# Altium PCB ui_pcb.PcbDoc
Units mm, origin at the board's own origin, x right, y up, seen from the top; angles counter-clockwise.
Board outline 60 x 75 mm, 4 copper layers (Top Layer, Int1 (GND), Int2 (PWR), Bottom Layer), stack 1.203 mm thick; 32 components, 36 nets, 112 pads, 0 vias.
Unrouted connection lines stored in the file: 72.
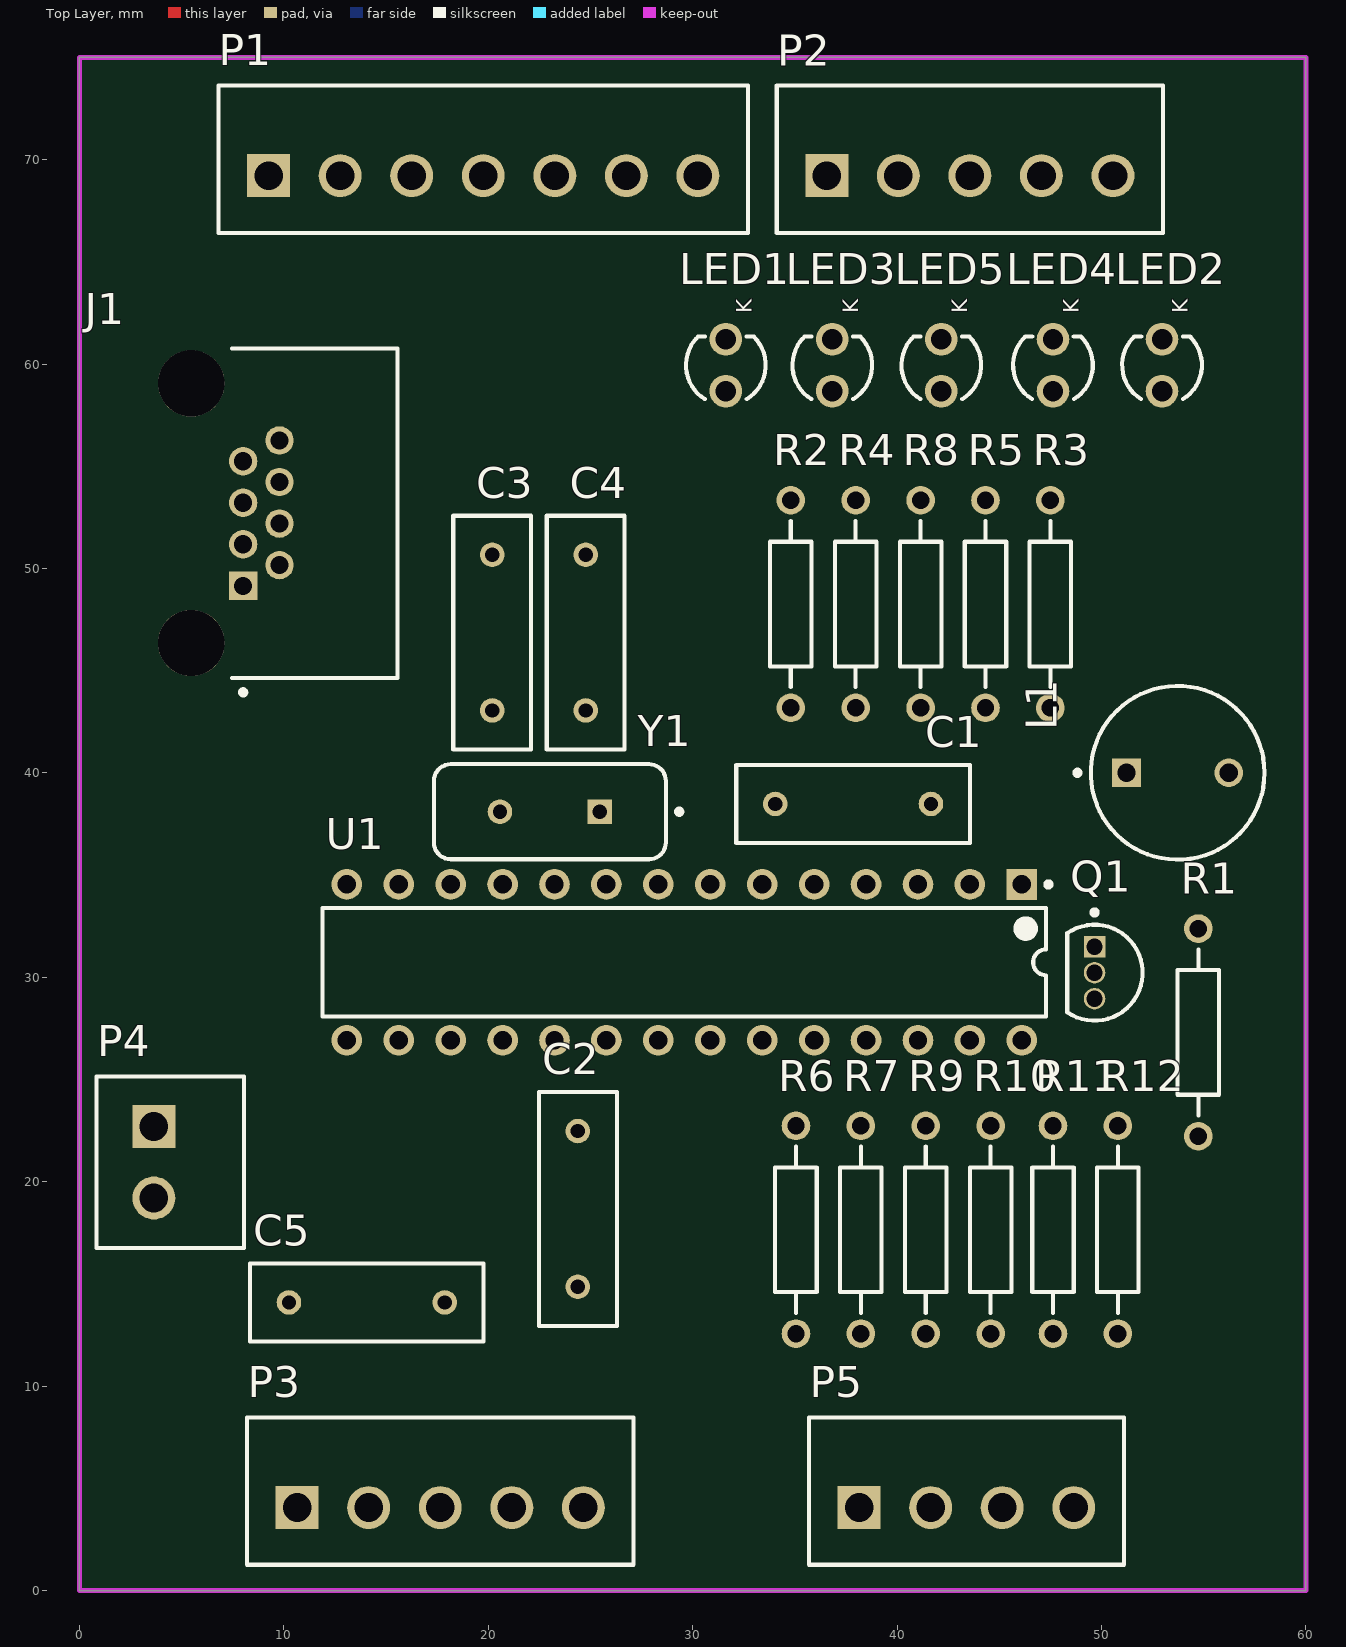
[diagram p0: Top Layer view]
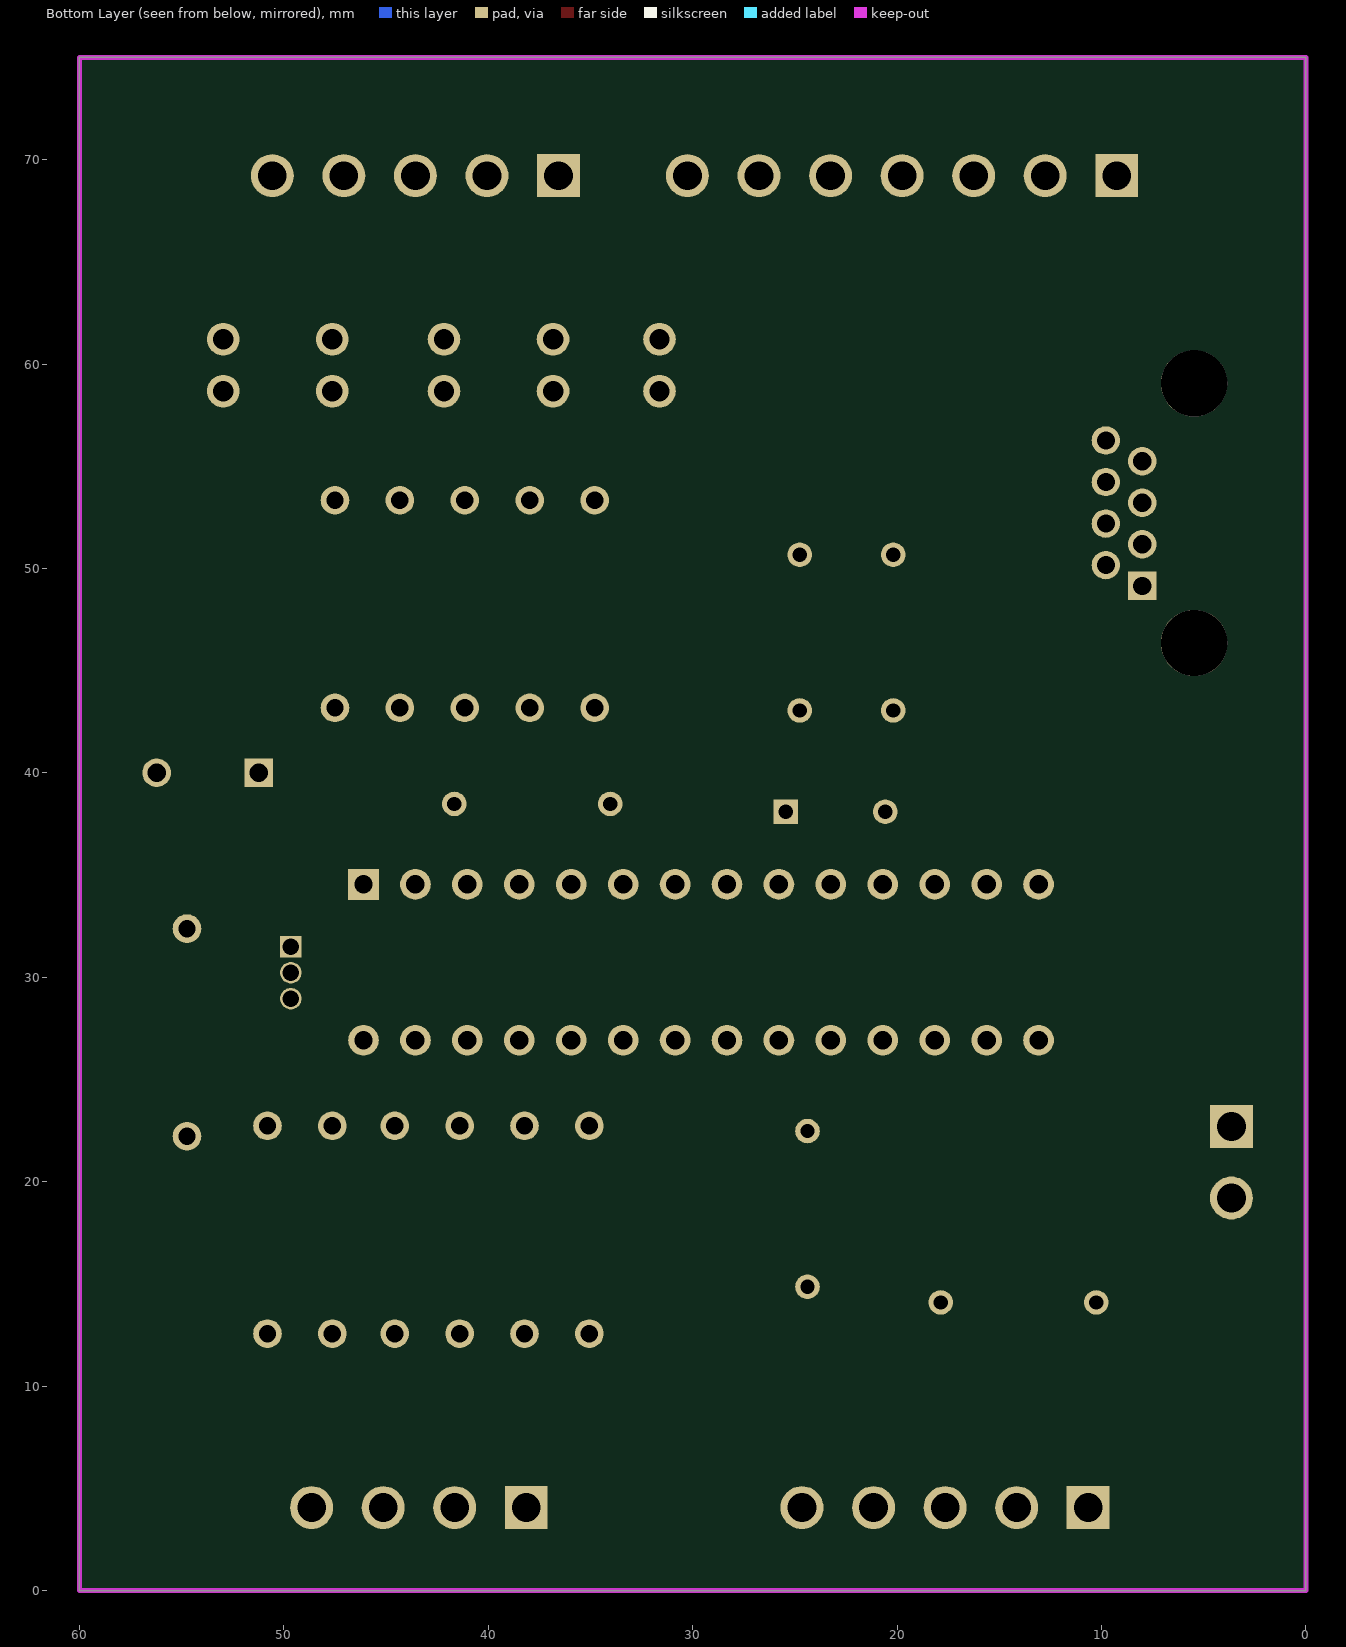
[diagram p1: Bottom Layer view, seen from below]
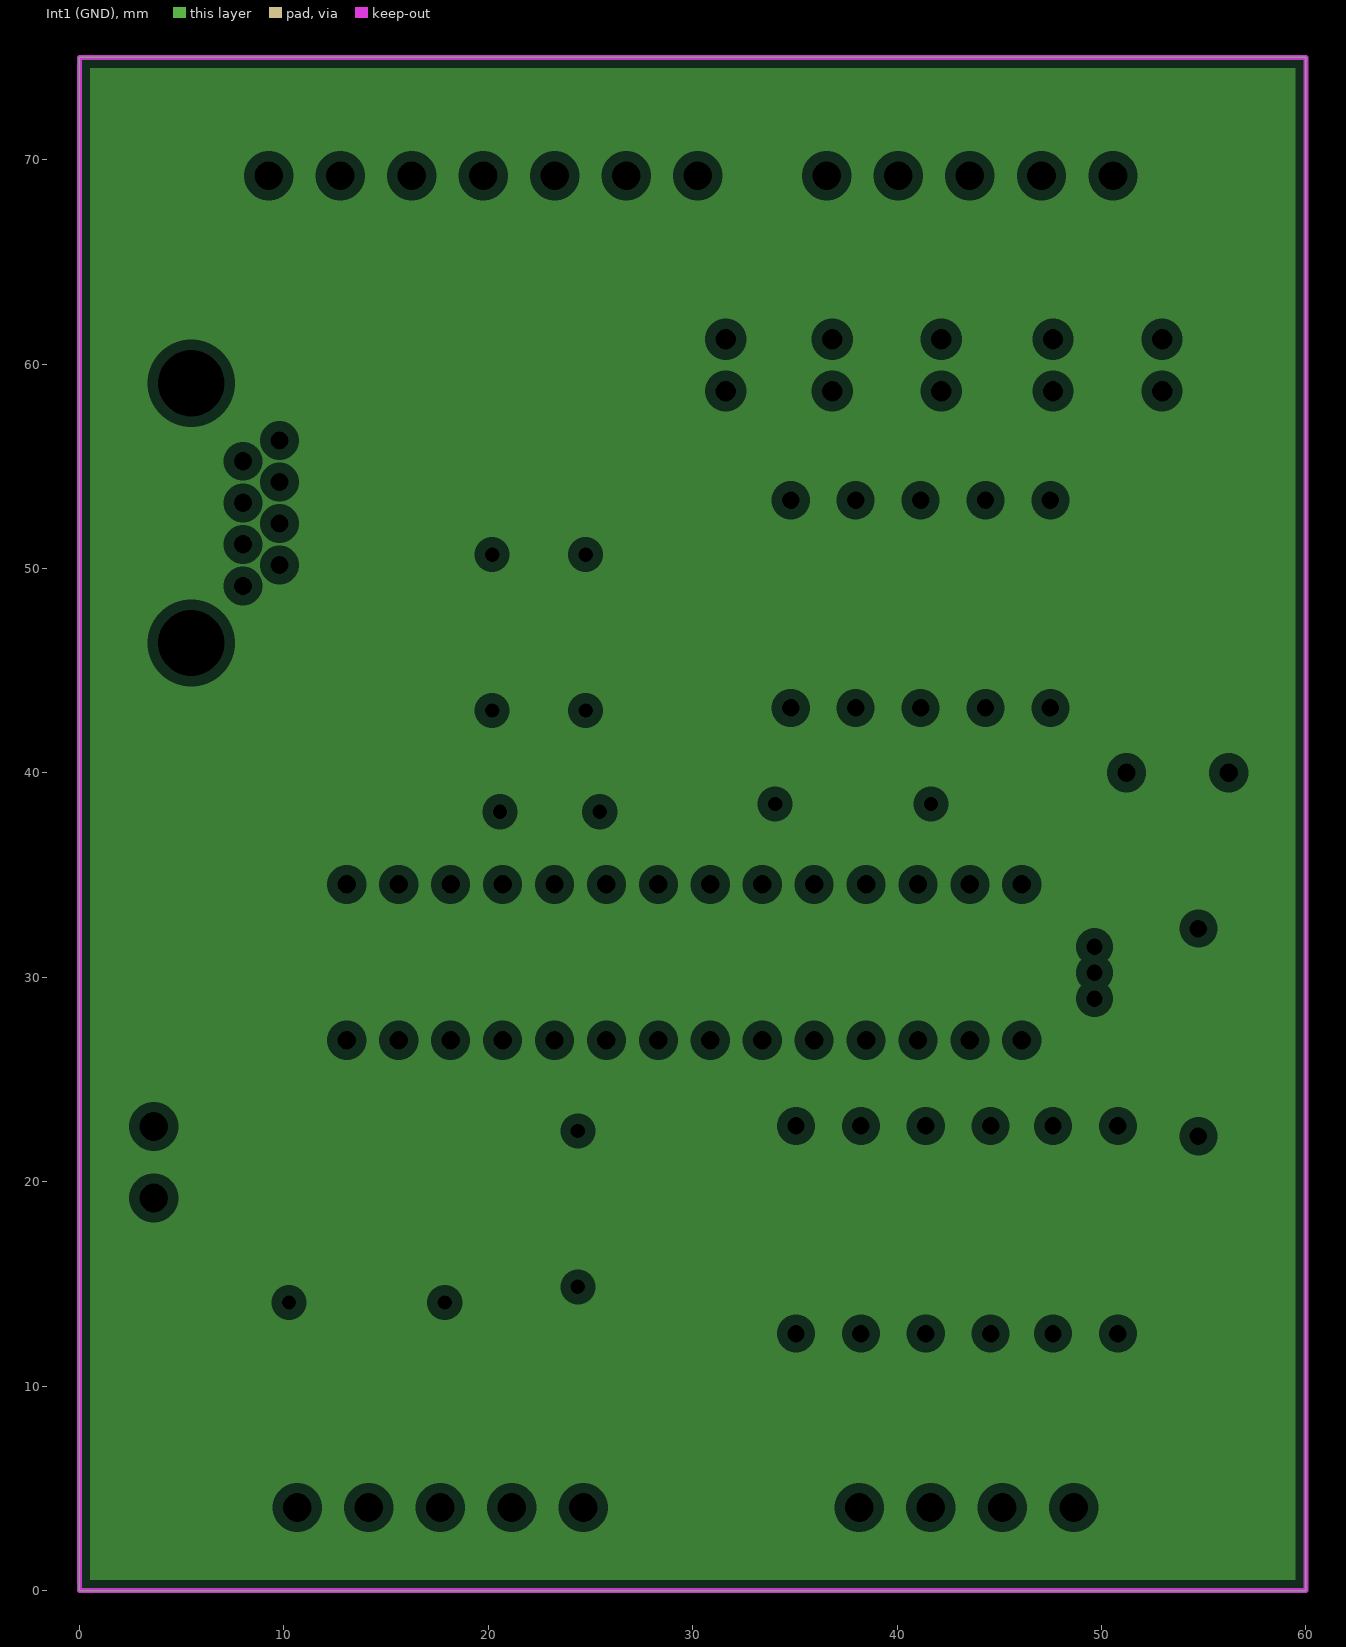
[diagram p2: Int1 (GND), clearances drawn from the general rule]
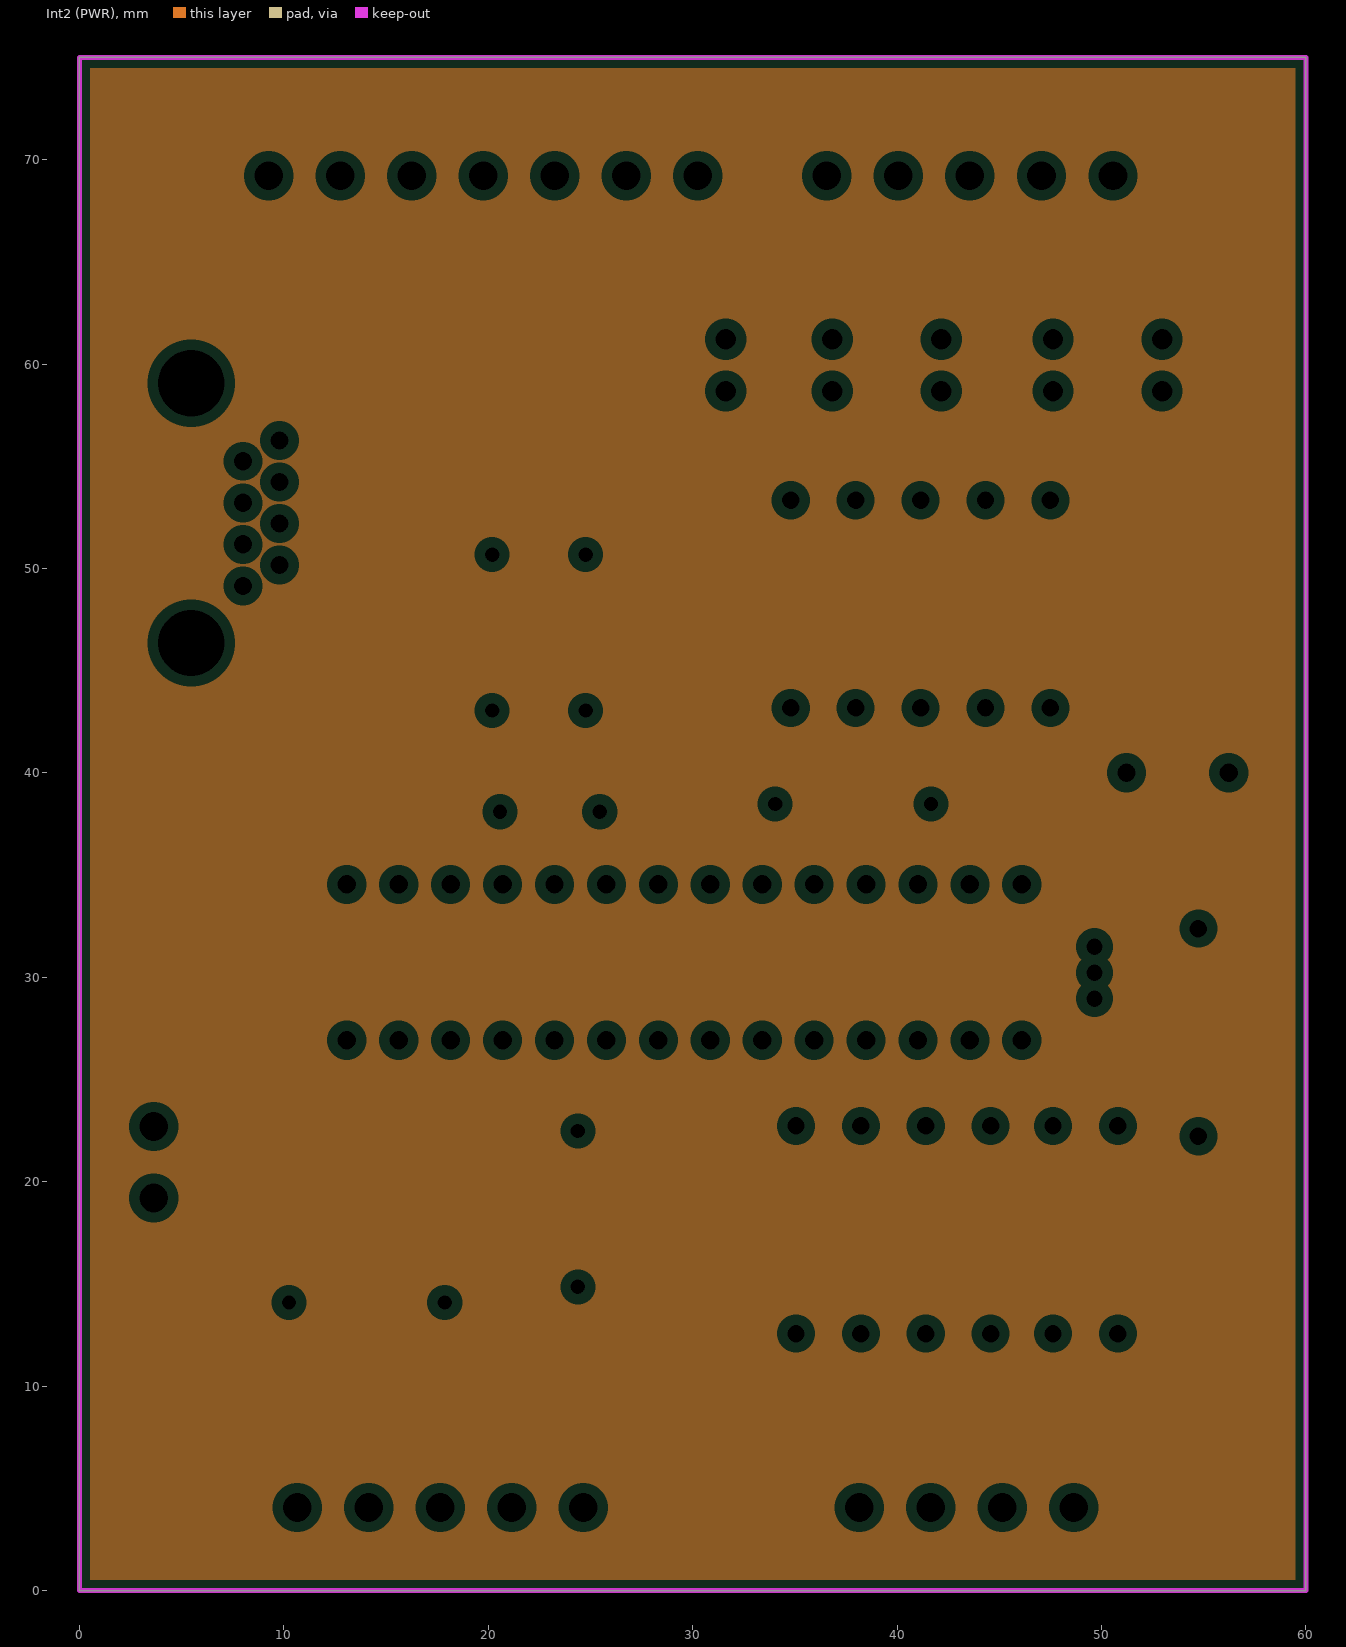
[diagram p3: Int2 (PWR), clearances drawn from the general rule]

## Layer stack, top to bottom
Top Solder: solder mask 0.0254, SM-001, Dk 4
Top Layer: signal copper 0.018
Dielectric 1: prepreg 0.0965, PP-012, Dk 4
Dielectric 2: prepreg 0.0965, PP-012, Dk 4
Int1 (GND): plane copper 0.035
Dielectric 3: core 0.7112, Core-039, Dk 4.8
Int2 (PWR): plane copper 0.035
Dielectric 4: prepreg 0.0965, PP-012, Dk 4
Dielectric 5: prepreg 0.0965, PP-012, Dk 4
Bottom Layer: signal copper 0.018
Bottom Solder: solder mask 0.0254, SM-001, Dk 4

## Board outline
0,0 60,0 60,75 0,75

## Design rules (kind name [scope] priority, off if disabled: settings)
Clearance [All] p1: gap=0.254 ignorepadtopadclearanceinfootprint=FALSE except(0: Arc-Hole Track-Hole SMDPad-Hole THPad-Hole Via-Hole Fill-Hole Poly-Hole Region-Hole Text-Hole)
PlaneClearance [All] p1: clearance=0.508
PlaneConnect [All] p1: planeconnectstyle=Relief reliefexpansion=0.508 reliefentries=4 reliefconductorwidth=0.254 reliefairgap=0.254
PolygonConnect [All] p1: connectstyle=Relief reliefconductorwidth=0.254 reliefentries=4 polygonreliefangle="90 Angle" airgapwidth=0.254
RoutingVias [All] p1: holewidth=0.711 width=1.27 viastyle="Through Hole" minholewidth=0.711 minwidth=1.27 maxholewidth=0.711 maxwidth=1.27
SolderMaskExpansion [All] p1: expansion=0.102 istentingtop=FALSE
Width [All] p1: maxlimit=0.254 minlimit=0.254 preferedwidth=0.254
28 further rules are at their usual default settings.

## Classes and differential pairs
component class U_ui_IO: C5 J1 LED1 LED2 LED3 LED4 LED5 P1 P2 P3 P4 P5 R2 R3 R4 R5 R6 R7 R8 R9 R10 R11 R12
component class U_uC_ui: C1 C2 C3 C4 L1 Q1 R1 U1 Y1

## Components (designator, comment, footprint, x,y, rotation, side; value= is the part's Value field where it differs from the comment)
C1 "Cap" RAD-0.3 37.846,38.481 r0 top value=100nF
C2 "Cap" RAD-0.3 24.384,18.669 r90 top value=100nF
C3 "Cap" RAD-0.3 20.193,46.863 r270 top value=22pF
C4 "Cap" RAD-0.3 24.765,46.863 r270 top value=22pF
C5 "Cap" RAD-0.3 14.062,14.097 r0 top value=100nF
J1 "RJHSE-5080" FP-RJHSE-5080-MFG 7.883,52.705 r270 top
L1 "10mH" INDR62-500-1100X850X1100 53.721,40.005 r0 top
LED1 "151033RS03000" "Type 3mm" 31.623,59.944 r90 top
LED2 "151033RS03000" "Type 3mm" 52.959,59.944 r90 top
LED3 "151033RS03000" "Type 3mm" 36.83,59.944 r90 top
LED4 "151033RS03000" "Type 3mm" 47.625,59.944 r90 top
LED5 "151033RS03000" "Type 3mm" 42.164,59.944 r90 top
P1 "691321100007" 691321100007 19.756,70.015 r0 top
P2 "691321100005" 691321100005 43.561,70.015 r0 top
P3 "691321100005" 691321100005 17.653,4.864 r0 top
P4 "691321100002" 691321100002 4.445,20.955 r270 top
P5 "691321100004" 691321100004 43.391,4.864 r0 top
Q1 "P2N2222AG" ONSC-TO-92-3-29-11 49.657,30.226 r270 top
R1 "Res1" AXIAL-0.4 54.737,27.305 r270 top value=10K
R2 "Res3" AXIAL-0.4 34.798,48.26 r270 top value=330
R3 "Res3" AXIAL-0.4 47.498,48.26 r270 top value=330
R4 "Res3" AXIAL-0.4 37.973,48.26 r270 top value=330
R5 "Res3" AXIAL-0.4 44.323,48.26 r270 top value=330
R6 "Res1" AXIAL-0.4 35.052,17.653 r270 top value=10k
R7 "Res1" AXIAL-0.4 38.227,17.653 r90 top value=10k
R8 "Res3" AXIAL-0.4 41.148,48.26 r270 top value=330
R9 "Res1" AXIAL-0.4 41.402,17.653 r270 top value=10k
R10 "Res1" AXIAL-0.4 44.577,17.653 r90 top value=10k
R11 "Res1" AXIAL-0.4 47.625,17.653 r270 top value=10k
R12 "Res1" AXIAL-0.4 50.8,17.653 r90 top value=10k
U1 "ATmega328-PU" 28P3 29.591,30.734 r270 top
Y1 "FOXSLF/160-20" FOX-FOXSLF160-20 23.014,38.1 r180 top

## Footprints (in the part's own frame and the unit in brackets; to place one, negate y for a bottom-side part, rotate by r counter-clockwise, add the part's x,y. Pads: shape width x height; smd on the part's side, far side on the other; paste and mask are expansions set on the pad)
28P3 [mm] "28-Pin Plastic Dual In-Line Package (PDIP)"
  rect 1.5x1.5 hole 0.9: 1(-3.81,16.51)
  round 1.5 hole 0.9: 2(-3.81,13.97) 3(-3.81,11.43) 4(-3.81,8.89) 5(-3.81,6.35) 6(-3.81,3.81) 7(-3.81,1.27) 8(-3.81,-1.27) 9(-3.81,-3.81) 10(-3.81,-6.35) 11(-3.81,-8.89) 12(-3.81,-11.43) 13(-3.81,-13.97) 14(-3.81,-16.51) 15(3.81,-16.51) 16(3.81,-13.97) 17(3.81,-11.43) 18(3.81,-8.89) 19(3.81,-6.35) 20(3.81,-3.81) 21(3.81,-1.27) 22(3.81,1.27) 23(3.81,3.81) 24(3.81,6.35) 25(3.81,8.89) 26(3.81,11.43) 27(3.81,13.97) 28(3.81,16.51)
  silkscreen extent -3.93,-17.7 2.65,17.94, body extent -3.6,-17.65 3.6,17.65, height 4.58
691321100002 [mm] "Vertical PCB Header, pitch 3.5mm, 02p"
  rect 2.1x2.1 hole 1.4: 1(-1.75,-0.8)
  round 2.1 hole 1.4: 2(1.75,-0.8)
  silkscreen extent -4.2,-3.6 4.2,3.6, body extent -4.2,-3.6 4.2,3.6, height 9.3
691321100004 [mm] "Vertical PCB Header, pitch 3.5mm, 04p"
  rect 2.1x2.1 hole 1.4: 1(-5.25,-0.8)
  round 2.1 hole 1.4: 2(-1.75,-0.8) 3(1.75,-0.8) 4(5.25,-0.8)
  silkscreen extent -7.7,-3.6 7.7,3.6, body extent -7.7,-3.6 7.7,3.6, height 9.3
691321100005 [mm] "Vertical PCB Header, pitch 3.5mm, 05p"
  rect 2.1x2.1 hole 1.4: 1(-7,-0.8)
  round 2.1 hole 1.4: 2(-3.5,-0.8) 3(0,-0.8) 4(3.5,-0.8) 5(7,-0.8)
  silkscreen extent -9.45,-3.6 9.45,3.6, body extent -9.45,-3.6 9.45,3.6, height 9.3
691321100007 [mm] "Vertical PCB Header, pitch 3.5mm, 07p"
  rect 2.1x2.1 hole 1.4: 1(-10.5,-0.8)
  round 2.1 hole 1.4: 2(-7,-0.8) 3(-3.5,-0.8) 4(0,-0.8) 5(3.5,-0.8) 6(7,-0.8) 7(10.5,-0.8)
  silkscreen extent -12.95,-3.6 12.95,3.6, body extent -12.95,-3.6 12.95,3.6, height 9.3
AXIAL-0.4 [mm] "Axial Device, Thru-Hole; 2 Leads; 0.4 in Pin Spacing"
  round 1.4 hole 0.85: 1(-5.08,0) 2(5.08,0)
  silkscreen extent -4.06,-1.02 4.06,1.02
FOX-FOXSLF160-20 [mm] "THD, 2-Leads, Body 11.35x4.65mm"
  rect 1.2x1.2 hole 0.7: 1(-2.44,0)
  round 1.2 hole 0.7: 2(2.44,0)
  silkscreen extent -6.45,-2.32 5.68,2.32, body extent -5.67,-2.32 5.68,2.33, height 3.6
FP-RJHSE-5080-MFG [mm]
  rect 1.39x1.39 hole 0.89 paste-1000 mask+0: 1(3.556,0.127)
  round 1.39 hole 0.89 paste-1000 mask+0: 2(2.54,1.905) 3(1.524,0.127) 4(0.508,1.905) 5(-0.508,0.127) 6(-1.524,1.905) 7(-2.54,0.127) 8(-3.556,1.905)
  round 3.25 hole 3.25 unplated paste-1000 mask+0: ""(-6.35,-2.413) ""(6.35,-2.413)
  silkscreen extent -8.06,-0.41 8.89,7.68, body extent -8.16,-7.78 8.16,7.78, height 0.25
INDR62-500-1100X850X1100 [mm] "THD, 2-Leads, Dia 8.5mm, Pitch 5mm"
  rect 1.4x1.4 hole 0.9 unplated: 1(-2.5,0)
  round 1.4 hole 0.9 unplated: 2(2.5,0)
  silkscreen extent -5.02,-4.25 4.25,4.25, body extent -4.25,-4.25 4.25,4.25, height 11
ONSC-TO-92-3-29-11 [mm] "TO, 3-Leads, Body Dia 4.7mm, Pitch 1.27mm"
  rect 1.05x1.05 hole 0.8: 1(-1.27,0)
  round 1.05 hole 0.8: 2(0,0) 3(1.27,0)
  silkscreen extent -3.07,-1.34 2.35,2.35, body extent -2.35,-1.33 2.36,2.36, height 7.87
RAD-0.3 [mm] "Radial Cap, Thru-Hole; 2 Leads; 0.3 in Pin Spacing"
  round 1.2 hole 0.7: 1(-3.81,0) 2(3.81,0)
  silkscreen extent -5.71,-1.91 5.71,1.91
"Type 3mm" [mm] "THT, LED-3mm, 2pin- Body 4.15mm(max)"
  round 1.6 hole 1: 1(1.27,0) 2(-1.27,0)
  silkscreen extent -1.66,-1.95 1.4,1.95, body extent -1.93,-1.94 1.87,1.94, height 10.5

## Part data
C1 C2 C3 C4 C5: "Capacitor", LatestRevisionDate=17-Jul-2002, LatestRevisionNote="Re-released for DXP Platform.", PackageDescription="Radial Cap, Thru-Hole; 2 Leads; 0.3 in Pin Spacing", PackageReference=RAD-0.3, Published=8-Jun-2000, Publisher="Altium Limited"
J1: library part CMP-02366-000003-1, "CONN MOD JACK 8P8C R/A UNSHLD", Current Rating=1.5A, Manufacturer=Amphenol, Package=CONN_MOD_JACK, Temperature="-55°C to +85°C", Temperature Range High=+85°C, Temperature Range Low=-55°C, Voltage Rating=125V, Automotive=No, Category=Conn, ComponentLink2Description=Datasheet, ComponentLink2URL=https://cdn.amphenol-icc.com/media/wysiwyg/files/documentation/datasheet/inputoutput/io-modjack-rjhse.pdf, Conn Gender=Female, Conn Orientation="Right Angle", Contact Material=Gold,Nickel, Device Class L1=Connectors, Device Class L2="Modular / Ethernet Connectors", Device Class L3=unset, Digikey Description="CONN MOD JACK 8P8C R/A UNSHLD", Footprint Url=https://cdn.amphenol-icc.com/media/wysiwyg/files/drawing/rjhse5080.pdf?__cf_chl_jschl_tk__=e349db0bbbb6188a39347cd5e541b92fa02c9719-1587748343-0-AW7tChdeHzRPLX9gSWj7WrKaXQoY9BsmT9Ek0h-T62M9y3Rs9iypFcOtkzb-6sGYQEjFE-jcoNciDETCOZrh1rYyOesac5SvYLoLwHIsHvF4AKBlx-MXmfZUVk9OTTJLqyQq2qMm0PFRLJpNcK0nrKResqOniRSYixG2sPTmOPraH-ULJFBDL602CHqcI9KKBgTq90Jh1OL2Td4moJ99rFsJRJ1Tk_uoxGe8ublcP_ARu-uLpWcQrBcwOcHDTAwL29DAwVaqcH7ta8Ks7WMlHmVl_pILeEDwT0bE9vu5Pa5S3PtNRF1leuFkgi_FMbUxTDulc5xzbXSfng8srUIV1lWXny5nx1fZJEUa_w97yKjffzBMxiWLWVN-V7-uqAaPbyv_m-wRyw5O25OZNyJOeGU, Height=0.535inch, Is Female=yes, Lead Free=Yes, Manufacturer Part Number=RJHSE-5080, Mouser Description="Modular Connectors / Ethernet Connectors R/A RJ45 NONSHIELDED 8 CONT NO LEDS", Number Of Contacts=8, Octopart=https://octopart.com/rjhse-5080-amphenol-45060, Pitch=1.02mm, RoHS=TRUE
L1: library part CMP-1747-00016-1, "Radial Inductor, 10 uH, +/- 10%, 3 A, -55 to 105 degC, 2-Pin THD, RoHS, Bulk", Case\Package=DIP, Max Operating Temperature="70 degC", Max Supply Voltage="36 V", Min Operating Temperature="0 degC", Min Supply Voltage="4.5 V", Output Current="600 mA", Package Quantity=25, ComponentLink1Description="Manufacturer URL", ComponentLink1URL=http://www.bourns.com/, ComponentLink2Description=Datasheet, ComponentLink2URL=http://www.bourns.com/docs/Product-Datasheets/rl622_series.pdf, DatasheetVersion=Aug-10, Height="0.25 inch", Interface=Parallel, Length="0.75 inch", Mount="Through Hole", Output Voltage="36 V", Outputs=4, PackageDescription="2-Pin Radial Lead, Dia 8.5 mm, Pitch 5 mm", PackageReference=INDR62-500-1100X850X1100, Packaging=Rail/Tube, Pins=16, Radiation Hardening=No, REACH SVHC="No SVHC", RoHSCompliant=true, Weight="0.03357 oz", Width="0.25 inch"
LED1 LED2 LED3 LED4 LED5: library part CMP-1489-00004-1, "THT LED round mono-color waterclear, WL-TMRW, Red", Emitting color=Red, Manufacturer="Wuerth Elektronik", ComponentLink1Description="Manufacturer URL", ComponentLink1URL=http://www.we-online.com, ComponentLink2Description=Datasheet, ComponentLink2URL=http://katalog.we-online.de/pbs/datasheet/7448042001.pdfhttp://katalog.we-online.de/pbs/datasheet/7448042001.pdfhttp://katalog.we-online.de/pbs/datasheet/7448042001.pdfhttp://katalog.we-online.de/pbs/datasheet/151033RS03000.pdf, PackageReference="Type 3mm", PartNumber=151033RS03000
P1: library part CMP-1502-01788-1, "Serie 3211 - 3.50mm Vertical PCB Header WR-TBL, 7 pin", Manufacturer="Wurth Elektronik", Operating Temperature=-40to105degC, Datasheet URL=http://katalog.we-online.de/em/datasheet/6913211000xx.pdf, Gender=Male, Manufacturer URL=http://www.we-online.de, Mounting Technology=THT, Package Reference=691321100007, Packaging=Box, Part Number=691321100007, Pin Number=7, Pitch=3.50mm, Publisher=WurthElektronik
P2 P3: library part CMP-1502-01786-1, "Serie 3211 - 3.50mm Vertical PCB Header WR-TBL, 5 pin", Manufacturer="Wurth Elektronik", Operating Temperature=-40to105degC, Datasheet URL=http://katalog.we-online.de/em/datasheet/6913211000xx.pdf, Gender=Male, Manufacturer URL=http://www.we-online.de, Mounting Technology=THT, Package Reference=691321100005, Packaging=Box, Part Number=691321100005, Pin Number=5, Pitch=3.50mm, Publisher=WurthElektronik
P4: library part CMP-1502-01783-1, "Serie 3211 - 3.50mm Vertical PCB Header WR-TBL, 2 pin", Manufacturer="Wurth Elektronik", Operating Temperature=-40to105degC, Datasheet URL=http://katalog.we-online.de/em/datasheet/6913211000xx.pdf, Gender=Male, Manufacturer URL=http://www.we-online.de, Mounting Technology=THT, Package Reference=691321100002, Packaging=Box, Part Number=691321100002, Pin Number=2, Pitch=3.50mm, Publisher=WurthElektronik
P5: library part CMP-1502-01785-1, "Serie 3211 - 3.50mm Vertical PCB Header WR-TBL, 4 pin", Manufacturer="Wurth Elektronik", Operating Temperature=-40to105degC, Datasheet URL=http://katalog.we-online.de/em/datasheet/6913211000xx.pdf, Gender=Male, Manufacturer URL=http://www.we-online.de, Mounting Technology=THT, Package Reference=691321100004, Packaging=Box, Part Number=691321100004, Pin Number=4, Pitch=3.50mm, Publisher=WurthElektronik
Q1: library part CMP-1048-01402-1, "Amplifier Transistor, NPN Silicon, 3-Pin TO-92, Pb-Free, Bulk Box", Manufacturer="On Semiconductor", ComponentLink1Description="Manufacturer URL", ComponentLink1URL=http://www.onsemi.com/, ComponentLink2Description=Datasheet, ComponentLink2URL=http://www.onsemi.com/pub_link/Collateral/P2N2222A-D.PDF, ComponentLink3Description="Package Specification", ComponentLink3URL=http://www.onsemi.cn/pub_link/Collateral/2N6426-D.PDF, DatasheetVersion="Rev. 7", fT Min (MHz)=300, IC Continuous (A)=0.6, Mounting Technology="Through Hole", PackageDescription="3-Pin Transistor Outline, Body 4.825 x 3.685 mm, Pitch 1.27 mm", PackageReference=TO-92-3-29-11_AM_SL, PackageVersion="Rev. AM", Packing="Bulk Box", PartNumber=P2N2222AG, Polarity=NPN, RoHS=TRUE
R1 R2 R3 R4 R5 R6 R7 R8 R9 R10 R11 R12: "Resistor", Published=8-Jun-2000, Publisher="Altium Limited"
  R1 R6 R7 R9 R10 R11 R12: LatestRevisionDate=17-Jul-2002, LatestRevisionNote="Re-released for DXP Platform.", PackageDescription="Axial Device, Thru-Hole; 2 Leads; 0.3 in Pin Spacing", PackageReference=AXIAL-0.3
  R2 R3 R4 R5 R8: LatestRevisionDate=29-May-2009, LatestRevisionNote="IPC-7351 Footprint Added.", PackageDescription="Chip Resistor", PackageReference=J1-0603
U1: library part CMP-0095-00015-2, "8-bit AVR Microcontroller, 32KB Flash, 1KB EEPROM, 2KB SRAM, 28-pin PDIP, Industrial Grade (-40°C to 85°C)", ComponentLink1Description="Manufacturer URL", ComponentLink1URL=http://www.atmel.com/, ComponentLink2Description="ATmega48A/48PA/88A/88PA/168A/168PA/328/328P Datasheet", ComponentLink2URL=http://www.atmel.com/dyn/resources/prod_documents/8271.pdf, ComponentLink3Description="ATmega48A/48PA/88A/88PA/168A/168PA/328/328P Summary", ComponentLink3URL=http://www.atmel.com/dyn/resources/prod_documents/8271S.pdf, DatasheetVersion="revD, May-2011", PackageDescription="28-lead (0.300\"/7.62mm Wide) Plastic Dual Inline Package (PDIP)", PackageReference=28P3, PackageVersion="revB, Sep-2001", RevisionNote="DatasheetVersion updated. URLs added."
Y1: library part CMP-1749-00003-1, "Resistance Weld Thru-Hole Crystal, 16 MHz, -20 to 70 degC, 2-Pin THD, RoHS, Bulk", Case\Package=Axial, Max Operating Temperature="155 degC", Min Operating Temperature="-55 degC", Package Quantity=200, Power Rating="250 mW", Resistance="221 kohm", Tolerance=1%, Voltage Rating="250 V", ComponentLink1Description="Manufacturer URL", ComponentLink1URL=http://www.foxonline.com/, ComponentLink2Description=Datasheet, ComponentLink2URL=http://www.foxonline.com/pdfs/hc49slf.pdf, DatasheetVersion=Mar-15, Length="0.248 inch", Mount="Through Hole", PackageDescription="2-Pin Through Hole Device, Body 11.35 x 4.65 mm", PackageReference=FOXSLF160-20, Packaging=Bulk, RoHSCompliant=true

## Nets (pads, with @x,y where several pads share a name; then routed paths per layer and width w, separated by ;. In a path a pad name is that pad's centre, name@x,y a point inside that pad or via, vN(x,y) a via of type N, cw(c..) or ccw(c..) an arc to the next point about the centre after c; other vN are vias at no path point)
+5: C5.2 L1.2 P2.2 P3.2 P4.2 R1.2 U1.7
GND: C1.1 C2.1 C3.1 C4.1 C5.1 LED1.1 LED2.1 LED3.1 LED4.1 LED5.1 P2.1 P3.1 P5.4 Q1.3 R7.1 R10.1 R12.1 U1.8 U1.22
MOSI: J1.3 P1.3 U1.17
NetC1_2: C1.2 L1.1 U1.20
NetC2_2: C2.2 U1.21
NetJ1_1: J1.1 U1.18
NetJ1_4: J1.4 U1.16
NetJ1_5: J1.5 U1.26
NetJ1_6: J1.6 U1.15
NetJ1_7: J1.7 U1.14
NetLED1_2: LED1.2 R2.1
NetLED2_2: LED2.2 R3.1
NetLED3_2: LED3.2 R4.1
NetLED4_2: LED4.2 R5.1
NetLED5_2: LED5.2 R8.1
NetP1_4: P1.4 U1.13
NetP3_3: P3.3 U1.12
NetP3_4: P3.4 U1.11
NetP3_5: P3.5 U1.6
NetP5_1: P5.1 R6.2
NetP5_2: P5.2 R9.2
NetP5_3: P5.3 R11.2
NetR6_1: R6.1 R7.2 U1.23
NetR9_1: R9.1 R10.2 U1.24
NetR11_1: R11.1 R12.2 U1.25
RES: Q1.1 R1.1 U1.1
RESET_UI: P2.4 Q1.2 R3.2
SCK: J1.2 P1.5 U1.19
STATUS: P1.1 R2.2 U1.5
STATUS_PW: P2.5 R8.2 U1.3
STATUS_T: P2.3 R4.2 U1.4
STATUS_UI: P1.2 R5.2 U1.2
T_pan: J1.8 P1.7
T_ui: P1.6 P4.1
XTAL1: C4.2 U1.9 Y1.1
XTAL2: C3.2 U1.10 Y1.2
pads on no net: J1. U1.27 U1.28

## Polygon pours and split planes (outlines as drawn)
no net on Int1 (GND) (split plane): 59.49,0.51 0.51,0.51 0.51,74.49 59.49,74.49
no net on Int2 (PWR) (split plane): 59.49,0.51 0.51,0.51 0.51,74.49 59.49,74.49

## Keep-outs
Keep-Out Layer:
  the board outline again, w0.254

## Text inside footprints (layer, text, board x,y; h text height)
LED1: Top Overlay "K" at 32.893,62.484 h0.76 r90; Top Courtyard "K" at 32.893,62.484 h0.76 r90
LED2: Top Overlay "K" at 54.229,62.484 h0.76 r90; Top Courtyard "K" at 54.229,62.484 h0.76 r90
LED3: Top Overlay "K" at 38.1,62.484 h0.76 r90; Top Courtyard "K" at 38.1,62.484 h0.76 r90
LED4: Top Overlay "K" at 48.895,62.484 h0.76 r90; Top Courtyard "K" at 48.895,62.484 h0.76 r90
LED5: Top Overlay "K" at 43.434,62.484 h0.76 r90; Top Courtyard "K" at 43.434,62.484 h0.76 r90